# EAGLE board VGA Blinken (EAGLE 7.2.0)
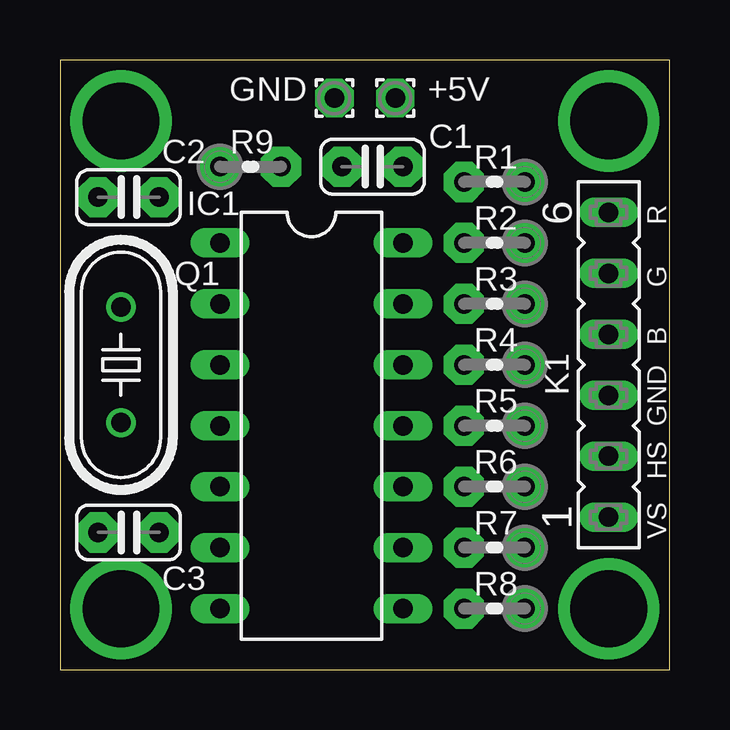
[diagram p0: board, top side]
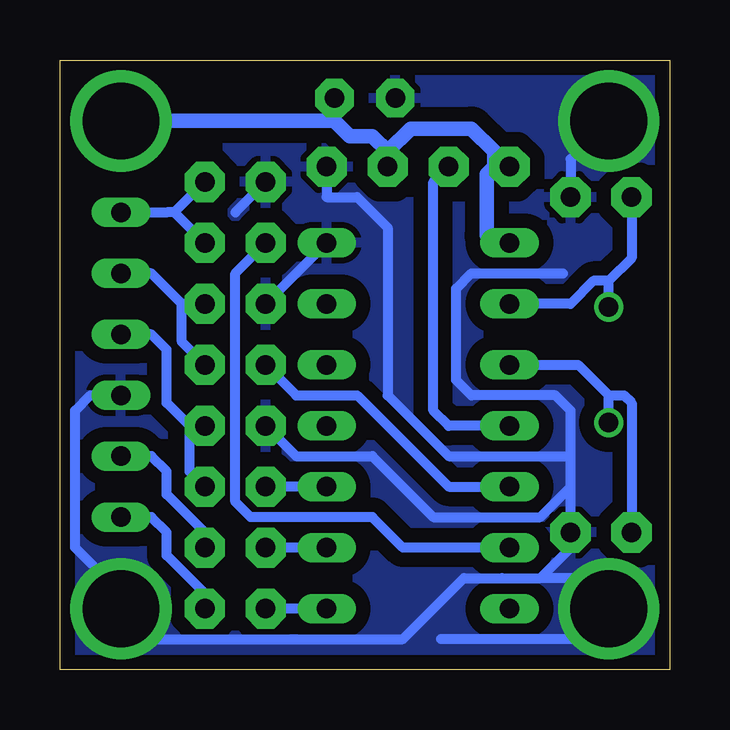
[diagram p1: board, bottom side, seen from below]

Size 25.4 x 25.4 mm. Coordinates in mm from the lower left corner, seen from the top.
Outline: 0,0 25.4,0 25.4,25.4 0,25.4 0,0
Copper layers (1*16): Top 0.0356mm / dielectric 1.5011mm / Bottom 0.0356mm
Design rules "LaenPCBOrder *": minimum track width 6mil, minimum drill 13mil, track to track 6mil, track to pad 6mil, pad to pad 6mil, via to via 6mil, smd to smd 6mil, copper to edge 15mil, drill to drill 6mil, minimum pad ring 7mil, minimum via ring 7mil, stop-mask expansion 3mil, vias tented up to drill 0mil, thermal gap 10mil

## Footprints (pad centres in the part's own frame; a part is rotated, then mirrored left to right if it is on the bottom)
1,6/0,8 = drill 0.813 pad 1.6 octagon: 1 0,0
C025-024X044L = drill 0.813 pad 1.676 octagon: 1 -1.27,0; 2 1.27,0
DIL14 = drill 0.813 long: 1 -7.62,-3.81; 2 -5.08,-3.81; 3 -2.54,-3.81; 4 0,-3.81; 5 2.54,-3.81; 6 5.08,-3.81; 7 7.62,-3.81; 8 7.62,3.81; 9 5.08,3.81; 10 2.54,3.81; 11 0,3.81; 12 -2.54,3.81; 13 -5.08,3.81; 14 -7.62,3.81
FE06 = drill 0.813 long: 1 -6.35,0; 2 -3.81,0; 3 -1.27,0; 4 1.27,0; 5 3.81,0; 6 6.35,0
HC49/S = drill 0.813: 1 -2.413,0; 2 2.413,0
0204VL = drill 0.813 pad 1.676 octagon: 1 -1.27,0; 2 1.27,0

## Placement (x,y rotation side)
+5V  [1,6/0,8]  13.97,23.81 180 top
C1  100n  [C025-024X044L]  13.02,20.95 0 top
C2  22p  [C025-024X044L]  2.86,19.68 0 top
C3  22p  [C025-024X044L]  2.86,5.71 0 top
GND  [1,6/0,8]  11.43,23.81 180 top
IC1  PIC16F688  [DIL14]  10.48,10.16 270 top
K1  [FE06]  22.86,12.7 90 top
Q1  20.0  [HC49/S]  2.54,12.7 270 top
R1  120  [0204VL]  18.1,20.32 180 top
R2  220  [0204VL]  18.1,17.78 180 top
R3  120  [0204VL]  18.1,15.24 180 top
R4  220  [0204VL]  18.1,12.7 180 top
R5  120  [0204VL]  18.1,10.16 180 top
R6  220  [0204VL]  18.1,7.62 180 top
R7  100  [0204VL]  18.1,5.08 180 top
R8  100  [0204VL]  18.1,2.54 180 top
R9  10k  [0204VL]  7.94,20.95 0 top

## Library data of the parts
+5V GND = wirepad
C1-C3 R1-R9 = rcl
IC1 = microchip; MF: MICROCHIP; MPN: PIC16F676-I/P; OC_FARNELL: 9760512; OC_NEWARK: 54K2829
K1 = con-lsta; OC_FARNELL: unknown; OC_NEWARK: unknown
Q1 = crystal; OC_FARNELL: 1667008; OC_NEWARK: unknown

## Nets
B: IC1.10 R6.2
BLU: K1.4 R5.1 R6.1
G: IC1.5 R4.2
GND: C1.2 C2.2 C3.2 GND.1 IC1.14 K1.3 R1.2 R3.2 R5.2
GRN: K1.5 R3.1 R4.1
HS: IC1.9 R7.2
HSYNC: K1.2 R7.1
R: IC1.6 R2.2
RED: K1.6 R1.1 R2.1
RST: IC1.4 R9.2
VCC: +5V.1 C1.1 IC1.1 R9.1
VS: IC1.8 R8.2
VSYNC: K1.1 R8.1
X1: C2.1 IC1.2 Q1.1
X2: C3.1 IC1.3 Q1.2

## Tracks (layer width: path | path; a pad name or v marks a point on that pad's centre or on a via)
B
  Bottom 0.406: IC1.10 R6.2
BLU
  Bottom 0.406: K1.4 21.59,13.97 20.95,13.34 20.95,11.11 20,10.16 | R6.1 20,8.26 20,10.16 | 20,10.16 R5.1
G
  Bottom 0.406: R4.2 15.56,11.43 13.02,11.43 9.21,7.62 IC1.5
GND  (via drill 3.2)
  Bottom 0.406: K1.3 24.13,11.43 24.77,10.79 24.77,5.08 22.86,3.17 v22.86,2.54 21.59,1.27 11.11,1.27 8.57,3.81 6.99,3.81 5.4,3.81 | 18.1,19.05 R1.2 | 4.13,8.89 9.21,8.89 11.75,11.43 11.75,18.41 13.02,19.68 14.29,19.68 C1.2 | R3.2 IC1.14 | 5.4,3.81 4.13,5.08 C3.2 4.13,7.62 | R5.2 15.56,8.89 12.38,8.89 9.84,6.35 5.4,6.35 4.13,7.62 | 4.13,7.62 4.13,8.89 | 4.13,8.89 4.13,10.79 4.76,11.43 8.26,11.43 8.89,12.06 8.89,15.88 8.26,16.51 4.45,16.51 | 9.53,1.27 3.81,1.27 v2.54,2.54 3.81,3.81 5.4,3.81 | v2.54,22.86 4.13,21.27 C2.2
  pour Bottom (isolate 0.61): 0,25.4 0,0 25.4,0 25.4,25.4
GRN
  Bottom 0.406: R4.1 20.32,13.65 20.32,15.24 | R3.1 20.32,15.24 | 20.32,15.24 21.59,16.51 K1.5
HS
  Bottom 0.406: IC1.9 R7.2
HSYNC
  Bottom 0.406: R7.1 19.37,5.71 20.95,7.3 20.95,8.26 21.59,8.89 K1.2
R
  Bottom 0.406: IC1.6 11.11,5.08 12.38,6.35 17.46,6.35 18.1,6.99 18.1,16.51 R2.2
RED
  Bottom 0.406: R1.1 20.64,19.05 | K1.6 20.95,19.05 20.64,19.05 | R2.1 20.64,19.05
RST
  Bottom 0.406: IC1.4 9.21,10.16 9.84,10.79 9.84,20.32 R9.2
VCC  (via drill 3.2)
  Bottom 0.61: v22.86,22.86 13.97,22.86 | 13.97,22.86 13.34,22.23 12.38,22.23 11.75,21.59 | C1.1 11.75,21.59 | 11.75,21.59 10.79,22.54 8.26,22.54 7.3,21.59 7.3,20.95 | +5V.1 13.97,22.86 | 7.3,20.95 7.62,20.64 7.62,18.1 7.3,17.78 IC1.1 | R9.1 7.3,20.95
VS
  Bottom 0.406: IC1.8 R8.2
VSYNC
  Bottom 0.406: R8.1 19.37,3.17 20.95,4.76 20.95,5.71 21.59,6.35 K1.1
X1
  Bottom 0.406: C2.1 1.59,17.14 2.54,16.19 | 2.54,16.19 3.17,16.19 4.13,15.24 IC1.2 | Q1.1 2.54,16.19
X2
  Bottom 0.406: IC1.3 3.81,12.7 2.54,11.43 | 2.54,11.43 1.91,11.43 1.59,11.11 C3.1 | Q1.2 2.54,11.43

## Text on the board
tPlace: R | G | B | GND | HS | VS